# EAGLE board pic16f877a_de (EAGLE 9.3.0)
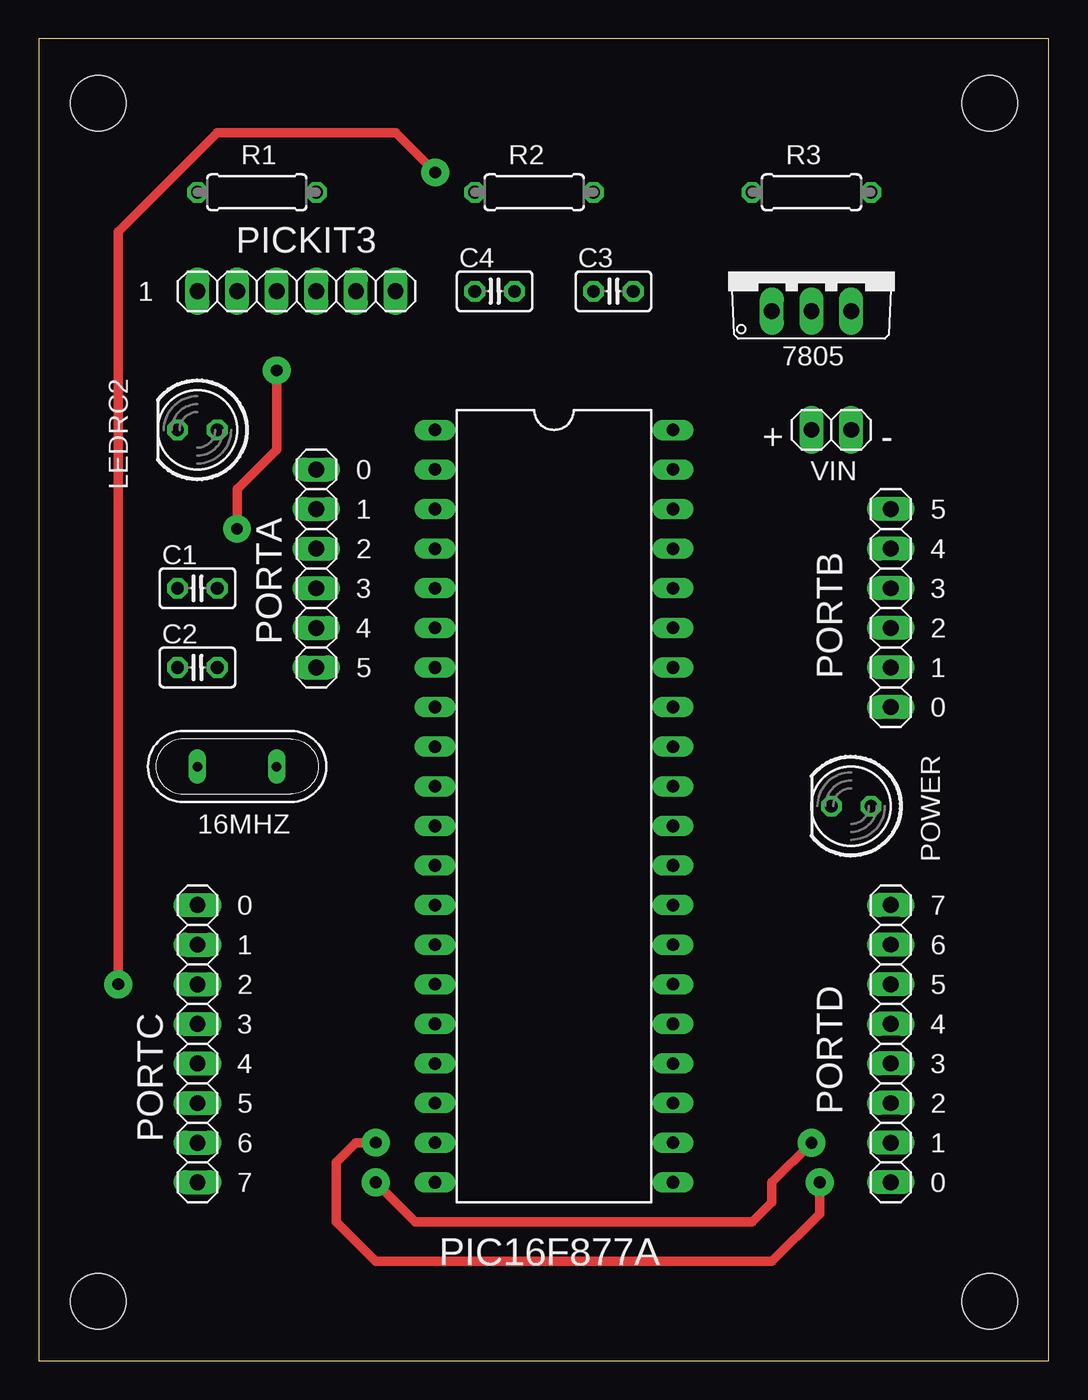
[diagram p0: board, top side]
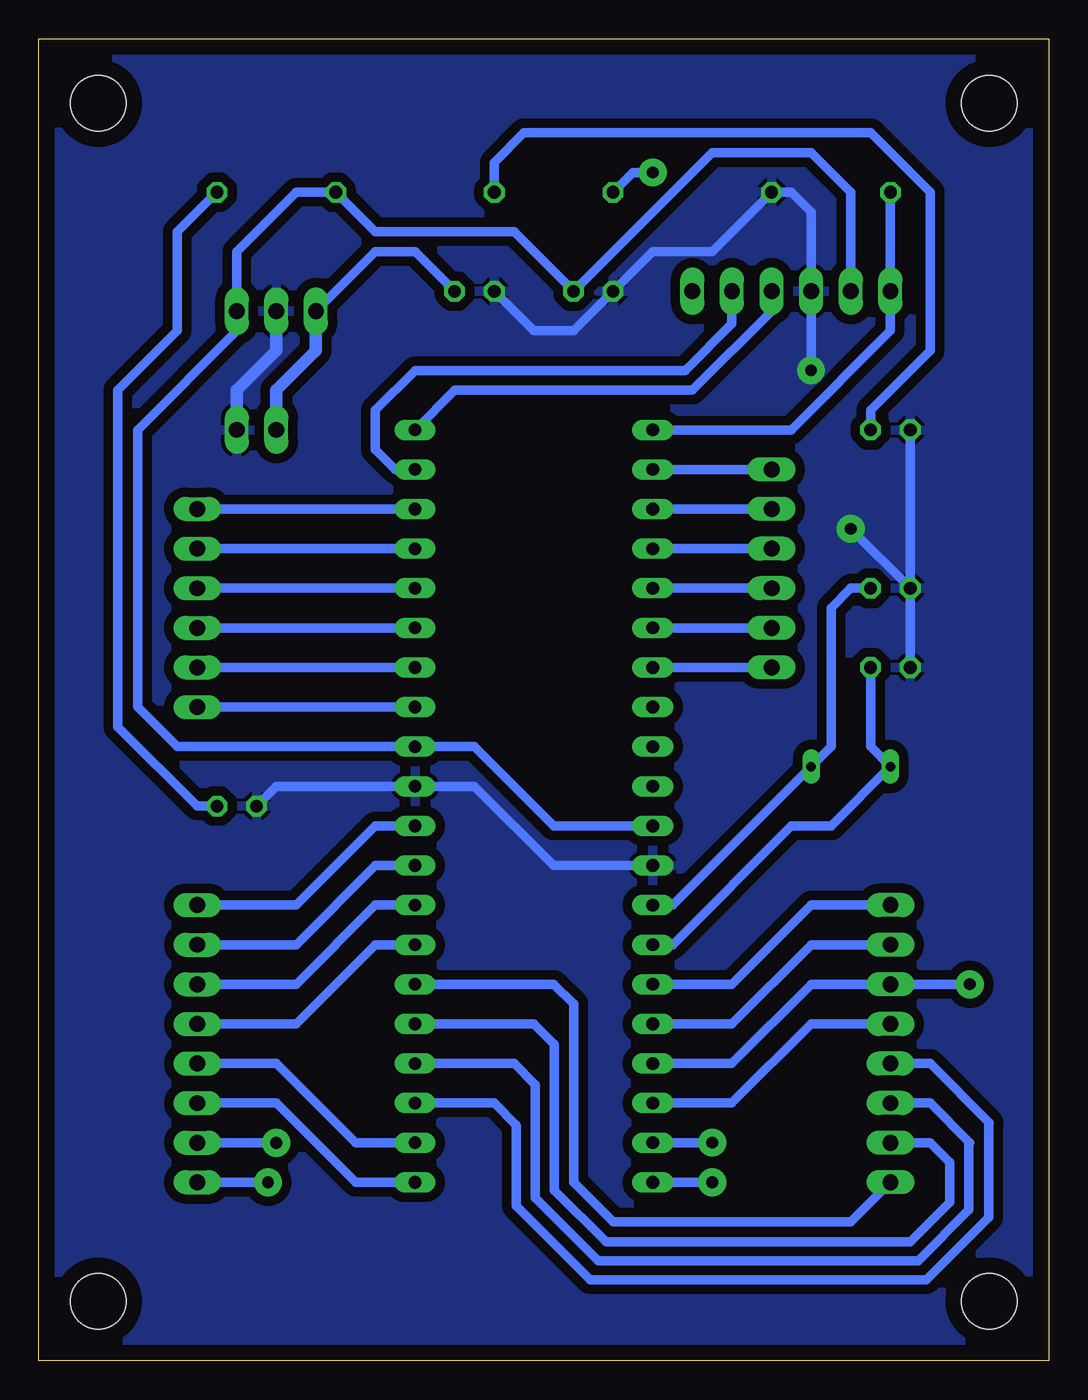
[diagram p1: board, bottom side, seen from below]

Size 64.75 x 84.76 mm. Coordinates in mm from the lower left corner, seen from the top.
Outline: 0,0 64.75,0 64.75,84.76 0,84.76 0,0
Copper layers (1*16): Top 0.035mm / dielectric 1.5mm / Bottom 0.035mm
Design rules "default *": minimum track width 6mil, minimum drill 0.35mm, track to track 24mil, track to pad 24mil, pad to pad 24mil, via to via 24mil, smd to smd 6mil, copper to edge 40mil, drill to drill 6mil, minimum pad ring 10mil, minimum via ring 8mil, stop-mask expansion 4mil, vias tented up to drill 0mil, thermal gap 10mil
Holes 3.56 mm at 3.81,80.64 60.96,80.64 60.96,3.81 3.81,3.81

## Footprints (pad centres in the part's own frame; a part is rotated, then mirrored left to right if it is on the bottom)
QS = drill 0.61 long: 1 -2.54,0; 2 2.54,0
TO220V = drill 1.016 long: 1 -2.54,-2.54; 2 0,-2.54; 3 2.54,-2.54
C025-025X050 = drill 0.813 octagon: 1 -1.27,0; 2 1.27,0
LED5MM = drill 0.813 octagon: A -1.27,0; K 1.27,0
MICROCHIP_DIL40 = drill 0.813 long: 1 -24.13,-7.62; 2 -21.59,-7.62; 3 -19.05,-7.62; 4 -16.51,-7.62; 5 -13.97,-7.62; 6 -11.43,-7.62; 7 -8.89,-7.62; 8 -6.35,-7.62; 9 -3.81,-7.62; 10 -1.27,-7.62; 11 1.27,-7.62; 12 3.81,-7.62; 13 6.35,-7.62; 14 8.89,-7.62; 15 11.43,-7.62; 16 13.97,-7.62; 17 16.51,-7.62; 18 19.05,-7.62; 19 21.59,-7.62; 20 24.13,-7.62; 21 24.13,7.62; 22 21.59,7.62; 23 19.05,7.62; 24 16.51,7.62; 25 13.97,7.62; 26 11.43,7.62; 27 8.89,7.62; 28 6.35,7.62; 29 3.81,7.62; 30 1.27,7.62; 31 -1.27,7.62; 32 -3.81,7.62; 33 -6.35,7.62; 34 -8.89,7.62; 35 -11.43,7.62; 36 -13.97,7.62; 37 -16.51,7.62; 38 -19.05,7.62; 39 -21.59,7.62; 40 -24.13,7.62
1X06 = drill 1.016 long: 1 -6.35,0; 2 -3.81,0; 3 -1.27,0; 4 1.27,0; 5 3.81,0; 6 6.35,0
1X08 = drill 1.016 long: 1 -8.89,0; 2 -6.35,0; 3 -3.81,0; 4 -1.27,0; 5 1.27,0; 6 3.81,0; 7 6.35,0; 8 8.89,0
0207/7 = drill 0.813 octagon: 1 -3.81,0; 2 3.81,0
1X02 = drill 1.016 long: 1 -1.27,0; 2 1.27,0

## Placement (x,y rotation side)
16MHZ  16MHz  [QS]  12.7,38.1 0 top
7805  786TV  [TO220V]  49.53,69.85 0 top
C1  22pF  [C025-025X050]  10.16,49.53 0 top
C2  22pF  [C025-025X050]  10.16,44.45 0 top
C3  100nF  [C025-025X050]  36.83,68.58 0 top
C4  100nF  [C025-025X050]  29.21,68.58 0 top
LEDRC2  [LED5MM]  10.16,59.69 180 top
PIC16F877A  MICROCHIP_PIC16F874P  [MICROCHIP_DIL40]  33.02,35.56 270 top
PICKIT3  [1X06]  16.51,68.58 0 top
PORTA  [1X06]  17.78,50.8 270 top
PORTB  [1X06]  54.61,48.26 90 top
PORTC  [1X08]  10.16,20.32 270 top
PORTD  [1X08]  54.61,20.32 90 top
POWER  [LED5MM]  52.07,35.56 180 top
R1  10k  [0207/7]  13.97,74.93 180 top
R2  100  [0207/7]  31.75,74.93 180 top
R3  1k  [0207/7]  49.53,74.93 180 top
VIN  [1X02]  50.8,59.69 0 top

## Library data of the parts
16MHZ = special
7805 = linear
C1-C4 = rcl; SPICEPREFIX: C
LEDRC2 POWER = led
PIC16F877A = pic16f877a; MPN: PIC16F874-04I/P; OC_FARNELL: 1196797; OC_NEWARK: 24M5903
PICKIT3 PORTA PORTB PORTC PORTD VIN = pinhead
R1-R3 = rcl; SPICEPREFIX: R

## Nets
+5V: 7805.3 C4.2 PIC16F877A.11 PIC16F877A.32 PICKIT3.2 R3.2
+12V: 7805.1 C3.2 VIN.1
GND: 7805.2 C1.1 C2.1 C3.1 C4.1 LEDRC2.K PIC16F877A.12 PIC16F877A.31 PICKIT3.3 POWER.K R1.1 VIN.2
MCLR: PIC16F877A.1 PICKIT3.1 R1.2
N$1: POWER.A R3.1
N$2: LEDRC2.A R2.1
OSC1: 16MHZ.2 C1.2 PIC16F877A.13
OSC2: 16MHZ.1 C2.2 PIC16F877A.14
PGC: PIC16F877A.39 PICKIT3.5
PGD: PIC16F877A.40 PICKIT3.4
RA0: PIC16F877A.2 PORTA.1
RA1: PIC16F877A.3 PORTA.2
RA2: PIC16F877A.4 PORTA.3
RA3: PIC16F877A.5 PORTA.4
RA4: PIC16F877A.6 PORTA.5
RA5: PIC16F877A.7 PORTA.6
RB0: PIC16F877A.33 PORTB.1
RB1: PIC16F877A.34 PORTB.2
RB2: PIC16F877A.35 PORTB.3
RB3: PIC16F877A.36 PORTB.4
RB4: PIC16F877A.37 PORTB.5
RB5: PIC16F877A.38 PORTB.6
RC0: PIC16F877A.15 PORTC.1
RC1: PIC16F877A.16 PORTC.2
RC2: PIC16F877A.17 PORTC.3 R2.2
RC3: PIC16F877A.18 PORTC.4
RC4: PIC16F877A.23 PORTC.5
RC5: PIC16F877A.24 PORTC.6
RC6: PIC16F877A.25 PORTC.7
RC7: PIC16F877A.26 PORTC.8
RD0: PIC16F877A.19 PORTD.1
RD1: PIC16F877A.20 PORTD.2
RD2: PIC16F877A.21 PORTD.3
RD3: PIC16F877A.22 PORTD.4
RD4: PIC16F877A.27 PORTD.5
RD5: PIC16F877A.28 PORTD.6
RD6: PIC16F877A.29 PORTD.7
RD7: PIC16F877A.30 PORTD.8

## Tracks (layer width: path | path; a pad name or v marks a point on that pad's centre or on a via)
+5V
  Bottom 0.61: PIC16F877A.11 31.75,34.29 36.83,39.37 PIC16F877A.32 55.88,39.37 58.42,41.91 58.42,59.69 52.07,66.04 7805.3 52.07,71.12 48.26,74.93 R3.2 43.18,72.39 34.29,72.39 C4.2 21.59,77.47 15.24,77.47 12.7,74.93 PICKIT3.2
+12V
  Bottom 0.61: C3.2 40.64,71.12 43.18,71.12 7805.1
  Bottom 0.813: 7805.1 46.99,64.77 49.53,62.23 VIN.1
GND  (via drill 0.75 pad 1.78)
  Top 0.61: v12.7,53.34 12.7,55.88 15.24,58.42 v15.24,63.51
  Bottom 0.61: POWER.K 49.53,36.83 PIC16F877A.31 36.83,36.83 31.75,31.75 PIC16F877A.12 | LEDRC2.K C1.1 | C1.1 C2.1 | C3.1 33.02,66.04 30.48,66.04 C4.1 25.4,71.12 21.59,71.12 R1.1 16.51,74.93 15.24,73.66 PICKIT3.3 v15.24,63.51 | C1.1 v12.7,53.34
  Bottom 0.813: 7805.2 49.53,64.77 52.07,62.23 VIN.2
  pour Bottom: 0,85.09 0,0 64.77,0 64.77,85.09
MCLR
  Bottom 0.61: R1.2 PICKIT3.1 10.16,66.04 16.51,59.69 PIC16F877A.1
N$1
  Bottom 0.61: POWER.A 54.61,35.56 59.69,40.64 59.69,62.23 55.88,66.04 55.88,72.39 R3.1
N$2
  Bottom 0.61: LEDRC2.A 11.43,60.96 7.62,64.77 7.62,74.93 11.43,78.74 33.66,78.74 35.56,76.83 R2.1
OSC1
  Bottom 0.61: PIC16F877A.13 24.13,29.21 16MHZ.2 13.97,39.37 13.97,48.26 12.7,49.53 C1.2
OSC2
  Bottom 0.61: PIC16F877A.14 24.13,26.67 16.51,34.29 13.97,34.29 16MHZ.1 11.43,39.37 C2.2
PGC
  Bottom 0.61: PIC16F877A.39 41.91,57.15 43.18,58.42 43.18,60.96 40.64,63.5 23.31,63.5 20.32,66.49 PICKIT3.5
PGD
  Bottom 0.61: PIC16F877A.40 38.1,62.23 22.86,62.23 17.78,67.31 PICKIT3.4
RA0
  Bottom 0.61: PORTA.1 PIC16F877A.2
RA1
  Bottom 0.61: PORTA.2 PIC16F877A.3
RA2
  Bottom 0.61: PORTA.3 PIC16F877A.4
RA3
  Bottom 0.61: PORTA.4 PIC16F877A.5
RA4
  Bottom 0.61: PORTA.5 PIC16F877A.6
RA5
  Bottom 0.61: PORTA.6 PIC16F877A.7
RB0
  Bottom 0.61: PIC16F877A.33 PORTB.1
RB1
  Bottom 0.61: PIC16F877A.34 PORTB.2
RB2
  Bottom 0.61: PIC16F877A.35 PORTB.3
RB3
  Bottom 0.61: PIC16F877A.36 PORTB.4
RB4
  Bottom 0.61: PIC16F877A.37 PORTB.5
RB5
  Bottom 0.61: PIC16F877A.38 PORTB.6
RC0
  Bottom 0.61: PORTC.1 15.24,29.21 20.32,24.13 PIC16F877A.15
RC1
  Bottom 0.61: PORTC.2 15.24,26.67 20.32,21.59 PIC16F877A.16
RC2  (via drill 0.75 pad 1.78)
  Top 0.61: v5.08,24.13 5.08,72.39 11.43,78.74 22.87,78.74 v25.41,76.2
  Bottom 0.61: PIC16F877A.17 20.32,19.05 15.24,24.13 PORTC.3 v5.08,24.13 | v25.41,76.2 v25.4,76.2 26.67,76.2 R2.2
RC3
  Bottom 0.61: PORTC.4 15.24,21.59 20.32,16.51 PIC16F877A.18
RC4
  Bottom 0.61: PORTC.5 7.62,19.05 3.81,15.24 3.86,15.19 3.86,9.2 7.88,5.18 29.4,5.18 34.14,9.91 34.14,15.09 35.56,16.51 PIC16F877A.23
RC5
  Bottom 0.61: PORTC.6 7.62,16.51 5.08,13.97 5.13,13.92 5.13,9.65 8.38,6.4 28.9,6.4 32.92,10.42 32.92,17.68 34.29,19.05 PIC16F877A.24
RC6
  Bottom 0.61: PORTC.7 7.62,13.97 6.35,12.7 6.35,10.16 8.89,7.62 28.39,7.62 31.7,10.93 31.7,20.27 33.02,21.59 PIC16F877A.25
RC7
  Bottom 0.61: PORTC.8 12.7,8.89 27.94,8.89 30.48,11.43 30.48,22.86 31.75,24.13 PIC16F877A.26
RD0  (via drill 0.75 pad 1.78)
  Top 0.61: v21.59,13.97 20.32,13.97 19.05,12.7 19.05,8.89 21.59,6.35 46.99,6.35 50.06,9.42 v50.06,11.43
  Bottom 0.61: PIC16F877A.19 v21.59,13.97 | v50.06,11.43 PORTD.1
RD1  (via drill 0.75 pad 1.78)
  Top 0.61: v21.59,11.43 24.13,8.89 45.72,8.89 46.99,10.16 46.99,11.42 v49.53,13.96
  Bottom 0.61: PIC16F877A.20 v21.59,11.43 | v49.53,13.96 v49.54,13.97 PORTD.2
RD2
  Bottom 0.61: PIC16F877A.21 44.45,11.43 49.53,16.51 PORTD.3
RD3
  Bottom 0.61: PIC16F877A.22 44.45,13.97 49.53,19.05 PORTD.4
RD4
  Bottom 0.61: PIC16F877A.27 43.18,26.67 48.26,21.59 PORTD.5
RD5
  Bottom 0.61: PIC16F877A.28 43.18,29.21 48.26,24.13 PORTD.6
RD6
  Bottom 0.61: PIC16F877A.29 43.18,31.75 48.26,26.67 PORTD.7
RD7
  Bottom 0.61: PIC16F877A.30 43.18,34.29 48.26,29.21 PORTD.8

## Text on the board
tNames: 1 | + | - | 0 | 1 | 5 | 2 | 4 | 3 | 3 | 4 | 2 | 5 | 1 | 0 | 0 | 7 | 1 | 6 | 2 | 5 | 3 | 4 | 4 | 3 | 5 | 2 | 6 | 1 | 7 | 0